# EAGLE board Rear CAN Backplane (EAGLE 5.12)
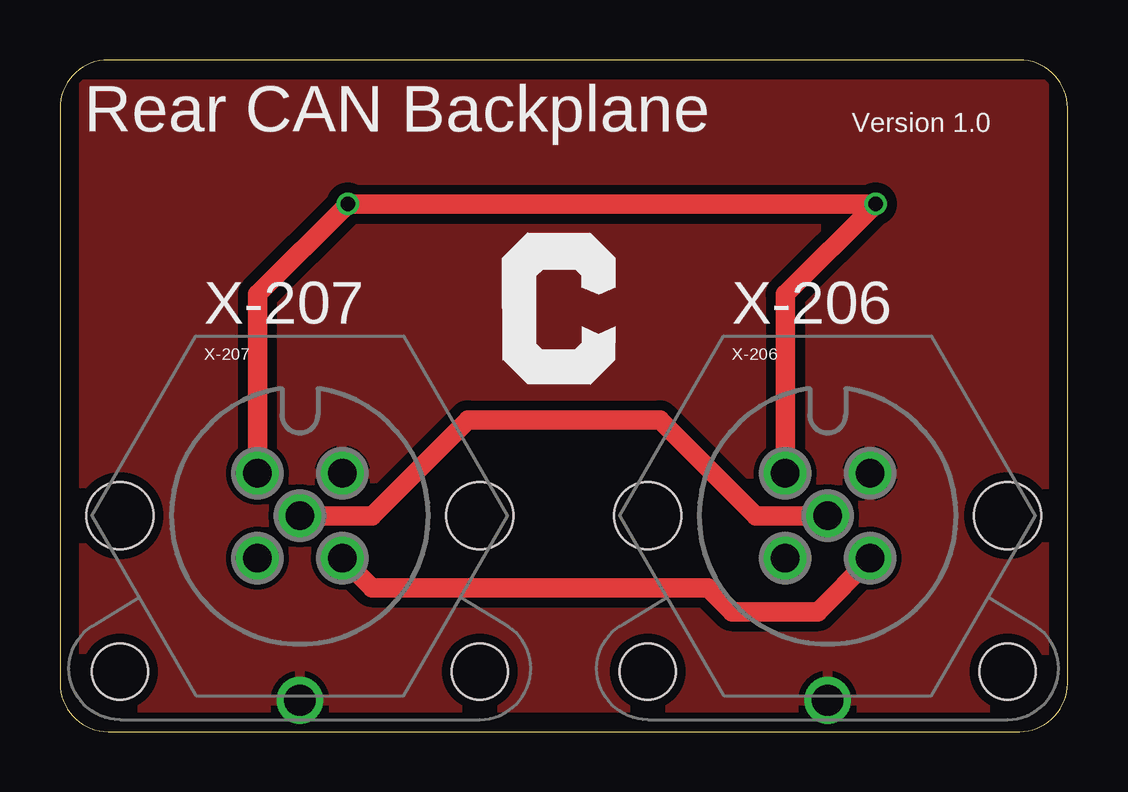
[diagram p0: board, top side]
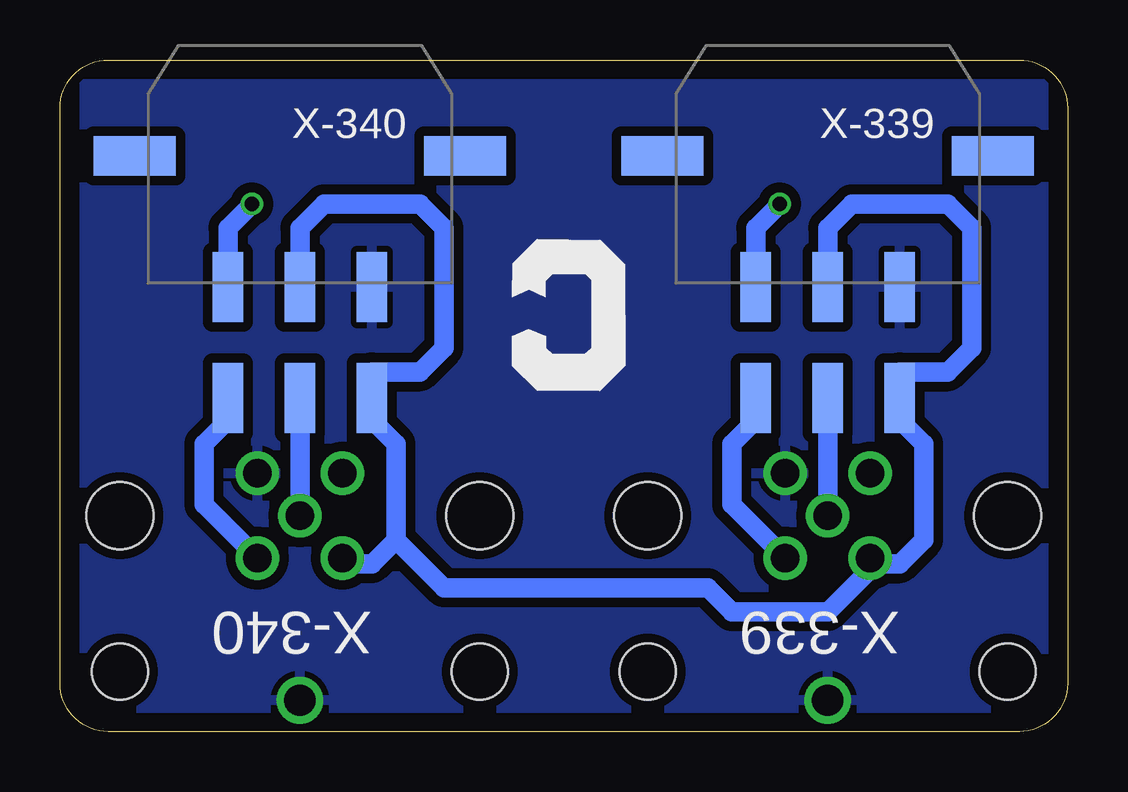
[diagram p1: board, bottom side, seen from below]

Size 42 x 28 mm. Coordinates in mm from the lower left corner, seen from the top.
Outline: 40,0 arc90 42,2 42,26 arc90 40,28 2,28 arc90 0,26 0,2 arc90 2,0 40,0
Copper layers (1*16): Top 0.0356mm / dielectric 1.5011mm / Bottom 0.0356mm
Design rules "OSH Park 2-layer": minimum track width 6mil, minimum drill 13mil, track to track 6mil, track to pad 6mil, pad to pad 6mil, via to via 6mil, smd to smd 6mil, copper to edge 15mil, drill to drill 6mil, minimum pad ring 7mil, minimum via ring 7mil, stop-mask expansion 4mil, vias tented up to drill 0mil, thermal gap 10mil

## Footprints (pad centres in the part's own frame; a part is rotated, then mirrored left to right if it is on the bottom)
M12-VERT-PCB = drill 1.2 round: 1 1.768,1.768; 2 -1.768,1.768; 3 -1.768,-1.768; 4 1.768,-1.768; 5 0,0 | drill 1.3 round: SHIELD 0,-7.7 | hole 2.8: 7.5,0; -7.5,0 | hole 2.35: 7.5,-6.5; -7.5,-6.5
MICROFIT-6-DUAL-RA-SMD = smd 1.27 x 2.921: 1 3,5.47; 2 0,5.47; 3 -3,5.47; 4 3,10.1; 5 0,10.1; 6 -3,10.1 | smd 3.429 x 1.651: P$9 6.883,0; P$10 -6.883,0

## Placement (x,y rotation side)
U$1  CURRENT-C-LETTER-LANDSCAPE  [BLANK]  -13.97,52.07 0 top  (outside the outline)
X-206  [M12-VERT-PCB]  32,9 0 top
X-207  [M12-VERT-PCB]  10,9 0 top
X-339  [MICROFIT-6-DUAL-RA-SMD]  10,24 180 bottom
X-340  [MICROFIT-6-DUAL-RA-SMD]  32,24 180 bottom

## Library data of the parts
U$1 = Frames; BOM: EXCLUDE
X-206 X-207 = Conec; PARTNO: 43-01169
X-339 X-340 = Molex; PARTNO: 43045-0609

## Nets
+12V: X-206.2 X-207.2 X-339.1 X-340.1
CAN_H: X-206.4 X-207.4 X-339.4 X-340.4
CAN_L: X-206.5 X-207.5 X-339.5 X-340.5
GND: X-206.3 X-207.3 X-339.2 X-339.6 X-340.2 X-340.6
SHIELD: X-206.1 X-206.SHIELD X-207.1 X-207.SHIELD X-339.3 X-340.3

## Tracks (layer width: path | path; a pad name or v marks a point on that pad's centre or on a via)
+12V  (via drill 0.6)
  Top 0.813: X-207.2 8.23,18.23 v12,22 v34,22 30.23,18.23 X-206.2
  Bottom 0.813: v12,22 13,21 X-339.1 | v34,22 35,21 X-340.1
CAN_H
  Top 0.813: X-207.4 13,6 27,6 28,5 31.6,5 33.77,7.17 X-206.4
  Bottom 0.813: X-339.4 13,13 14,12 14,9.46 X-207.4 | X-340.4 35,13 36,12 36,9.46 X-206.4
CAN_L
  Top 0.813: X-207.5 13,9 17,13 25,13 29,9 X-206.5
  Bottom 0.813: X-207.5 X-339.5 | X-206.5 X-340.5
GND
  Bottom 0.813: 10,18 X-339.2 10,21 9,22 5,22 4,21 4,16 5,15 7,15 X-339.6 7,13 6,12 6,8 7,7 8,7 | 8,7 X-207.3 | X-206.3 30,7 29,7 28,8 | 28,8 28,12 29,13 X-340.6 29,15 27,15 26,16 26,21 27,22 31,22 32,21 X-340.2 | 8,7 10,5 14,5 15,6 26,6 28,8
SHIELD
  pour Bottom (isolate 0.406): 1,27 41,27 41,1 1,1 1,3
  pour Top (isolate 0.406): 1,27 41,27 41,1 1,1

## Text on the board
_tsilk: Rear CAN Backplane | Version 1.0 | X-207 | X-206
_bsilk: X-339 | X-340